# EAGLE board coil-driver (EAGLE 4.16)
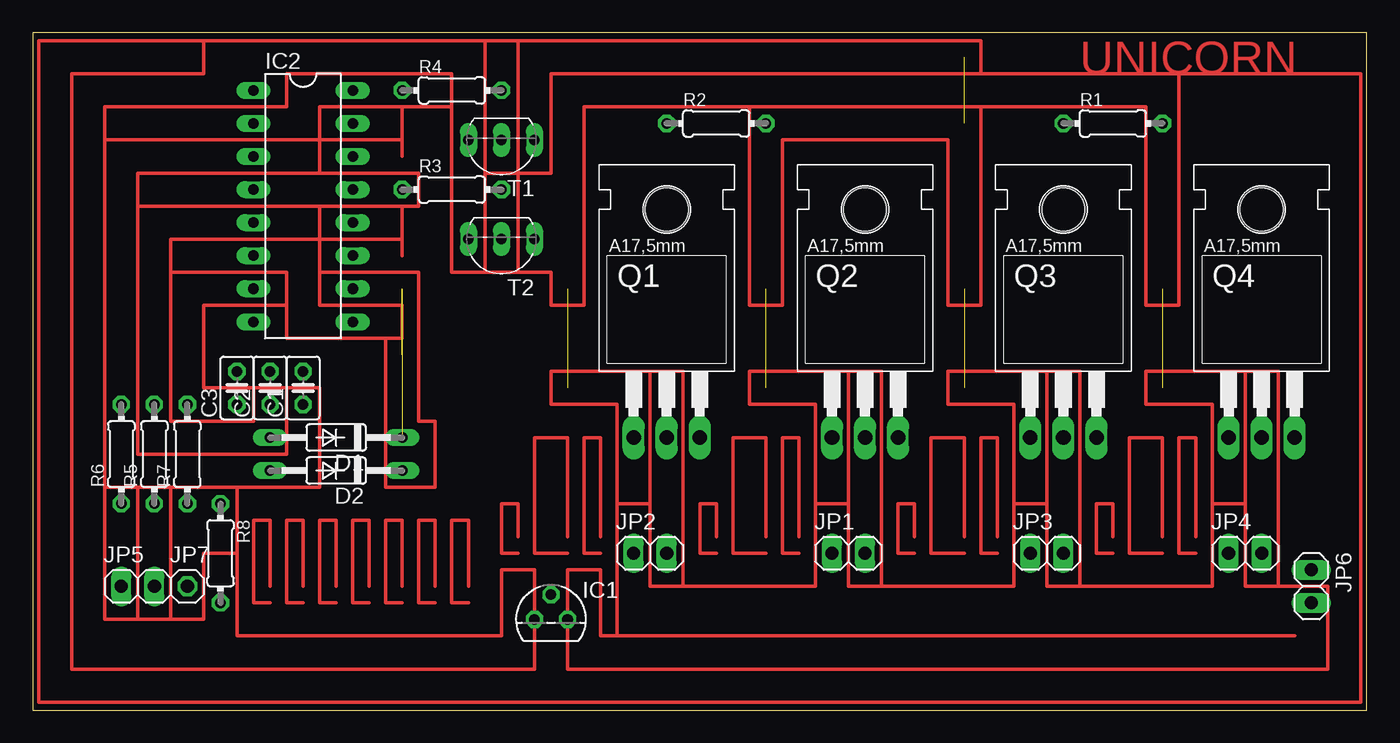
[diagram p0: board, top side]
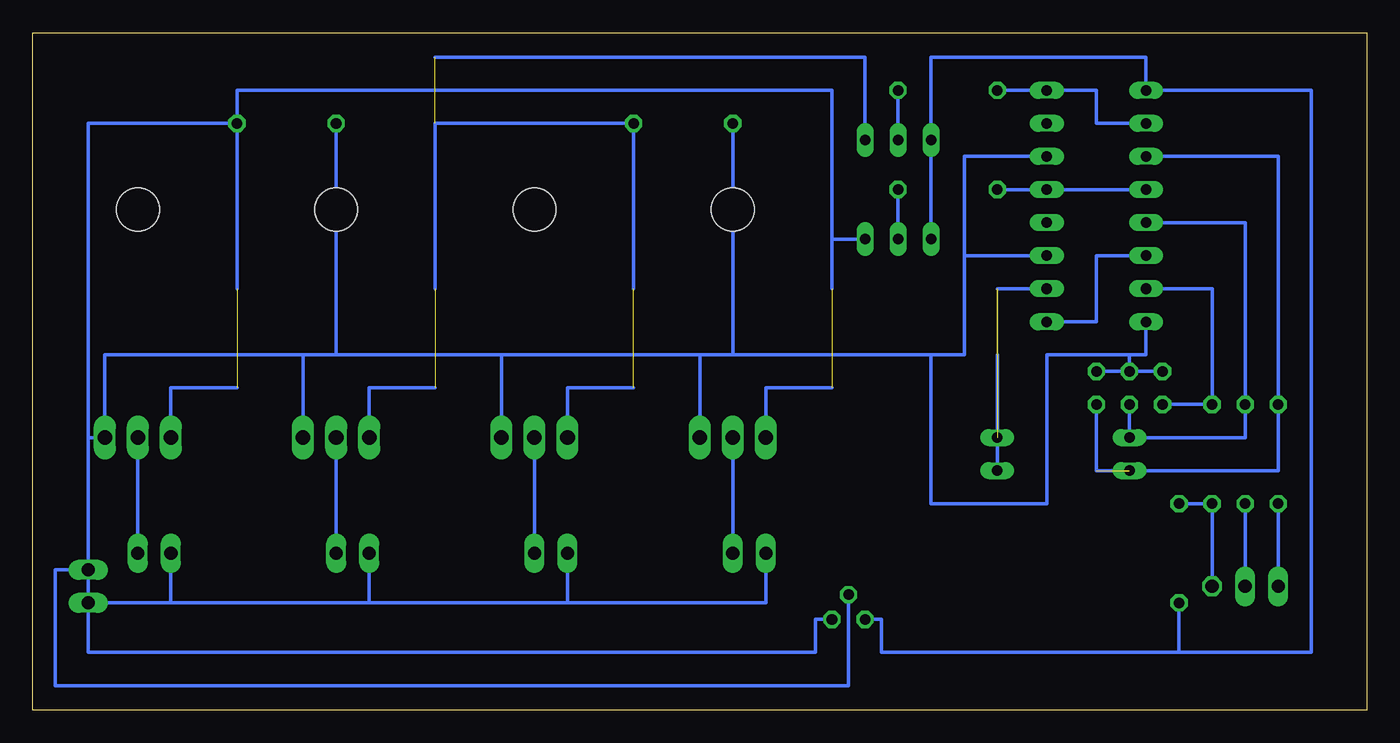
[diagram p1: board, bottom side, seen from below]

Size 102.54 x 52.06 mm. Coordinates in mm from the lower left corner, seen from the top.
Outline: 0,0 102.54,0 102.54,52.06 0,52.06 0,0
Copper layers (1*16): Top 0.035mm / dielectric 1.5mm / Bottom 0.035mm
Design rules "default": minimum track width 10mil, minimum drill 24mil, track to track 8mil, track to pad 8mil, pad to pad 8mil, via to via 8mil, smd to smd 8mil, copper to edge 40mil, drill to drill 8mil, minimum pad ring 10mil, minimum via ring 8mil, stop-mask expansion 4mil, vias tented up to drill 0mil, thermal gap 10mil

## Footprints (pad centres in the part's own frame; a part is rotated, then mirrored left to right if it is on the bottom)
C025-025X050 = drill 0.813 octagon: 1 -1.27,0; 2 1.27,0
DO35-10 = drill 0.813 long: A 5.08,0; C -5.08,0
TO92 = drill 0.813 octagon: 1 -1.27,0; 2 0,1.905; 3 1.27,0
DIL16 = drill 0.813 long: 1 -8.89,-3.81; 2 -6.35,-3.81; 3 -3.81,-3.81; 4 -1.27,-3.81; 5 1.27,-3.81; 6 3.81,-3.81; 7 6.35,-3.81; 8 8.89,-3.81; 9 8.89,3.81; 10 6.35,3.81; 11 3.81,3.81; 12 1.27,3.81; 13 -1.27,3.81; 14 -3.81,3.81; 15 -6.35,3.81; 16 -8.89,3.81
1X02 = drill 1.016 long: 1 -1.27,0; 2 1.27,0
1X01 = drill 1.016 octagon: 1 0,0
TO220 = drill 1.118 long: 1 -2.54,-6.35; 2 0,-6.35; 3 2.54,-6.35 | hole 3.302: 0,11.176
0204/7 = drill 0.813 octagon: 1 -3.81,0; 2 3.81,0
TO92-EBC = drill 0.813 long: B 0,-1.27; C -2.54,-1.27; E 2.54,-1.27

## Placement (x,y rotation side)
C1  [C025-025X050]  20.79,24.76 90 top
C2  [C025-025X050]  18.25,24.76 90 top
C3  [C025-025X050]  15.71,24.76 90 top
D1  [DO35-10]  23.33,20.95 180 top
D2  [DO35-10]  23.33,18.41 180 top
IC1  7805L  [TO92]  39.84,6.98 0 top
IC2  4049N  [DIL16]  20.79,38.73 270 top
JP1  [1X02]  62.7,12.06 0 top
JP2  [1X02]  47.46,12.06 0 top
JP3  [1X02]  77.94,12.06 0 top
JP4  [1X02]  93.18,12.06 0 top
JP5  [1X02]  8.09,9.52 0 top
JP6  [1X02]  98.26,9.52 270 top
JP7  [1X01]  11.9,9.52 0 top
Q1  BUZ10  [TO220]  48.73,27.3 0 top
Q2  BUZ10  [TO220]  63.97,27.3 0 top
Q3  BUZ10  [TO220]  79.21,27.3 0 top
Q4  BUZ10  [TO220]  94.45,27.3 0 top
R1  1k  [0204/7]  83.02,45.08 0 top
R2  1k  [0204/7]  52.54,45.08 0 top
R3  1k  [0204/7]  32.22,40 0 top
R4  1k  [0204/7]  32.22,47.62 0 top
R5  10k  [0204/7]  9.36,19.68 90 top
R6  10k  [0204/7]  6.82,19.68 90 top
R7  10k  [0204/7]  11.9,19.68 90 top
R8  10k  [0204/7]  14.44,12.06 270 top
T1  [TO92-EBC]  36.03,42.54 180 top
T2  [TO92-EBC]  36.03,34.92 180 top

## Library data of the parts
C1-C3 R1-R8 = rcl
D1 D2 = diode
IC1 = linear
IC2 = 40xx
JP1-JP7 = pinhead
Q1-Q4 = transistor-fet
T1 T2 = transistor

## Nets
0V: C1.2 C2.2 C3.2 IC1.2 IC2.8 IC2.11 IC2.14 JP6.1 Q1.3 Q2.3 Q3.3 Q4.3 R1.1 R2.1
+5V: IC1.1 IC2.1 R8.2 T1.E T2.E
+12V: IC1.3 JP1.1 JP2.1 JP3.1 JP4.1 JP6.2
N$1: IC2.2 R4.1
N$2: JP3.2 Q3.2
N$3: IC2.4 R3.1
N$4: JP2.2 Q1.2
N$5: JP1.2 Q2.2
N$6: R4.2 T1.B
N$7: JP4.2 Q4.2
N$8: R3.2 T2.B
N$9: Q2.1 Q3.1 R2.2 T1.C
N$10: C2.1 D1.A IC2.5 R5.2
N$11: Q1.1 Q4.1 R1.2 T2.C
N$12: C1.1 D2.A IC2.3 R6.2
N$13: D1.C D2.C IC2.10
N$14: JP5.2 R5.1
N$15: JP5.1 R6.1
N$16: IC2.6 IC2.9
N$17: C3.1 IC2.7 R7.2
N$44: JP7.1 R7.1 R8.1

## Tracks (layer width: path | path; a pad name or v marks a point on that pad's centre or on a via)
0V
  Bottom 0.254: 51.27,27.3 Q1.3 | 66.51,27.3 51.27,27.3 | 66.51,27.3 Q2.3 | 81.75,27.3 Q3.3 | 79.21,27.3 66.51,27.3 | 81.75,27.3 79.21,27.3 | 81.75,27.3 96.99,27.3 Q4.3 98.26,20.95 JP6.1 100.8,10.79 100.8,1.9 39.84,1.9 IC1.2 | IC2.8 16.98,27.3 18.25,27.3 | 18.25,27.3 24.6,27.3 24.6,15.87 33.49,15.87 33.49,27.3 | 48.73,27.3 33.49,27.3 | 51.27,27.3 48.73,27.3 | 48.73,27.3 R2.1 | 79.21,27.3 R1.1 | 30.95,34.92 IC2.11 | 30.95,34.92 30.95,27.3 33.49,27.3 | IC2.14 30.95,42.54 30.95,34.92 | C2.2 C3.2 | C2.2 C1.2 | 18.25,27.3 C2.2
+5V
  Bottom 0.254: T2.E T1.E 33.49,50.16 16.98,50.16 IC2.1 4.28,47.62 4.28,4.44 37.3,4.44 | R8.2 14.44,4.44 37.3,4.44 | IC1.1 37.3,6.98 37.3,4.44
+12V
  Bottom 0.254: JP2.1 46.19,8.25 61.43,8.25 | 61.43,8.25 JP1.1 | 76.67,8.25 JP3.1 | 76.67,8.25 61.43,8.25 | 91.91,8.25 JP4.1 | 91.91,8.25 76.67,8.25 | 91.91,8.25 JP6.2 98.26,4.44 42.38,4.44 42.38,6.98 IC1.3
N$1
  Bottom 0.254: IC2.2 20.79,45.08 20.79,47.62 R4.1
N$2
  Bottom 0.254: JP3.2 Q3.2
N$3
  Bottom 0.254: IC2.4 R3.1
N$4
  Bottom 0.254: JP2.2 Q1.2
N$5
  Bottom 0.254: JP1.2 Q2.2
N$6
  Bottom 0.254: T1.B R4.2
N$7
  Bottom 0.254: JP4.2 Q4.2
N$8
  Bottom 0.254: T2.B R3.2
N$9  (3 unrouted)
  Bottom 0.254: Q2.1 61.43,24.76 56.35,24.76 | 56.35,32.38 R2.2 71.59,45.08 71.59,32.38 | 71.59,24.76 76.67,24.76 Q3.1 | T1.C 38.57,50.16 71.59,50.16
N$10
  Bottom 0.254: IC2.5 9.36,37.46 R5.2 9.36,20.95 D1.A C2.1
N$11  (2 unrouted)
  Bottom 0.254: Q4.1 91.91,24.76 86.83,24.76 | R1.2 86.83,47.62 41.11,47.62 41.11,36.19 | R1.2 86.83,32.38 | 41.11,36.19 41.11,32.38 | 41.11,24.76 46.19,24.76 Q1.1 | 41.11,36.19 T2.C | R1.2 98.26,45.08 98.26,4.44 42.38,4.44 42.38,6.98
N$12  (1 unrouted)
  Bottom 0.254: IC2.3 6.82,42.54 R6.2 6.82,18.41 20.79,18.41 C1.1
N$13  (2 unrouted)
  Bottom 0.254: IC2.10 28.41,32.38 | D2.C 28.41,27.3
N$14
  Bottom 0.254: JP5.2 R5.1
N$15
  Bottom 0.254: JP5.1 R6.1
N$16
  Bottom 0.254: IC2.6 20.79,34.92 20.79,29.84 IC2.9
N$17
  Bottom 0.254: IC2.7 11.9,32.38 R7.2 C3.1
N$18  (via drill 0.6 pad 2.54)
  other vias: 48.73,38.73
N$19  (via drill 0.6 pad 2.54)
  other vias: 63.97,38.73
N$20  (via drill 0.6 pad 2.54)
  other vias: 79.21,38.73
N$21  (via drill 0.6 pad 2.54)
  other vias: 94.45,38.73
N$23
  Top 0.254: 65.24,9.52 65.24,26.03 62.7,26.03 | 65.24,9.52 75.4,9.52 75.4,15.87 | 75.4,15.87 75.4,23.49 70.32,23.49 70.32,26.03 77.94,26.03 | 77.94,15.87 75.4,15.87 | 77.94,26.03 77.94,15.87 | 65.24,9.52 62.7,9.52 62.7,15.87 | 62.7,26.03 55.08,26.03 55.08,23.49 60.16,23.49 60.16,15.87 | 62.7,15.87 62.7,26.03 | 77.94,26.03 80.48,26.03 80.48,9.52 | 77.94,15.87 77.94,9.52 80.48,9.52 | 60.16,15.87 62.7,15.87 | 60.16,15.87 60.16,9.52 50,9.52 | 80.48,9.52 90.64,9.52 90.64,15.87 | 90.64,15.87 90.64,23.49 85.56,23.49 85.56,26.03 93.18,26.03 | 50,9.52 50,26.03 47.46,26.03 | 50,9.52 47.46,9.52 47.46,15.87 | 47.46,26.03 39.84,26.03 39.84,23.49 44.92,23.49 44.92,15.87 | 93.18,15.87 90.64,15.87 | 93.18,26.03 93.18,15.87 | 93.18,26.03 95.72,26.03 95.72,9.52 | 93.18,15.87 93.18,9.52 95.72,9.52 | 47.46,15.87 47.46,26.03 | 44.92,15.87 47.46,15.87 | 44.92,5.71 96.99,5.71 | 95.72,9.52 99.53,9.52 99.53,3.17 41.11,3.17 41.11,10.79 43.65,10.79 43.65,5.71 44.92,5.71 | 44.92,5.71 44.92,15.87
N$24
  Top 0.254: 18.25,8.25 16.98,8.25 16.98,14.6 18.25,14.6 18.25,9.52
N$25
  Top 0.254: 20.79,8.25 19.52,8.25 19.52,14.6 20.79,14.6 20.79,9.52
N$26
  Top 0.254: 23.33,8.25 22.06,8.25 22.06,14.6 23.33,14.6 23.33,9.52
N$27
  Top 0.254: 22.06,33.65 29.68,33.65 29.68,22.22 30.95,22.22 30.95,17.14 27.14,17.14 27.14,28.57 | 27.14,28.57 22.06,28.57 | 27.14,28.57 19.52,28.57 19.52,31.11 | 19.52,31.11 13.17,31.11 13.17,24.76 16.98,24.76 | 27.14,28.57 28.41,28.57 28.41,31.11 22.06,31.11 22.06,36.19 | 19.52,31.11 19.52,33.65 10.63,33.65 | 10.63,33.65 10.63,22.22 16.98,22.22 16.98,24.76 | 10.63,33.65 10.63,36.19 22.06,36.19 | 19.52,24.76 22.06,24.76 22.06,17.14 15.71,17.14 | 19.52,24.76 16.98,24.76 | 19.52,24.76 19.52,19.68 8.09,19.68 8.09,38.73 | 10.63,6.98 13.17,6.98 13.17,12.06 15.71,12.06 | 28.41,38.73 28.41,34.92 | 28.41,38.73 28.41,36.19 22.06,36.19 | 22.06,38.73 28.41,38.73 | 22.06,38.73 22.06,36.19 | 8.09,38.73 22.06,38.73 | 28.41,38.73 29.68,38.73 29.68,41.27 22.06,41.27 | 15.71,17.14 10.63,17.14 | 10.63,17.14 10.63,6.98 | 10.63,6.98 8.09,6.98 | 55.08,46.35 55.08,31.11 57.62,31.11 57.62,43.81 70.32,43.81 70.32,31.11 72.86,31.11 72.86,46.35 | 8.09,6.98 5.55,6.98 5.55,17.14 | 10.63,17.14 8.09,17.14 | 8.09,17.14 8.09,6.98 | 8.09,38.73 8.09,41.27 22.06,41.27 | 55.08,46.35 42.38,46.35 42.38,31.11 39.84,31.11 39.84,33.65 37.3,33.65 | 28.41,46.35 22.06,46.35 22.06,43.81 | 32.22,46.35 28.41,46.35 | 28.41,46.35 28.41,43.81 | 28.41,43.81 28.41,42.54 | 5.55,17.14 8.09,17.14 | 32.22,46.35 32.22,48.89 19.52,48.89 19.52,46.35 5.55,46.35 5.55,43.81 | 72.86,46.35 55.08,46.35 | 72.86,46.35 85.56,46.35 85.56,31.11 88.1,31.11 88.1,48.89 | 5.55,43.81 5.55,17.14 | 28.41,43.81 22.06,43.81 | 22.06,43.81 22.06,41.27 | 32.22,46.35 32.22,33.65 34.76,33.65 | 34.76,33.65 37.3,33.65 | 37.3,41.27 37.3,33.65 | 37.3,41.27 39.84,41.27 39.84,48.89 72.86,48.89 | 22.06,43.81 5.55,43.81
  Top 0.254: 72.86,48.89 72.86,51.43 37.3,51.43 | 37.3,51.43 37.3,41.27 | 34.76,41.27 34.76,33.65 | 34.76,41.27 37.3,41.27 | 34.76,51.43 34.76,41.27 | 34.76,51.43 37.3,51.43 | 88.1,48.89 72.86,48.89 | 88.1,48.89 102.07,48.89 102.07,0.63 0.47,0.63 0.47,51.43 13.17,51.43 | 13.17,51.43 13.17,48.89 3.01,48.89 3.01,3.17 38.57,3.17 38.57,10.79 36.03,10.79 36.03,5.71 15.71,5.71 15.71,12.06 | 13.17,51.43 34.76,51.43 | 15.71,12.06 15.71,17.14
N$28
  Top 0.254: 25.87,8.25 24.6,8.25 24.6,14.6 25.87,14.6 25.87,9.52
N$29
  Top 0.254: 52.54,12.06 51.27,12.06 51.27,15.87 52.54,15.87 52.54,13.33
N$30
  Top 0.254: 56.35,12.06 53.81,12.06 53.81,20.95 56.35,20.95 56.35,13.33
N$31
  Top 0.254: 58.89,12.06 57.62,12.06 57.62,20.95 58.89,20.95 58.89,13.33
N$32
  Top 0.254: 67.78,12.06 66.51,12.06 66.51,15.87 67.78,15.87 67.78,13.33
N$33
  Top 0.254: 71.59,12.06 69.05,12.06 69.05,20.95 71.59,20.95 71.59,13.33
N$34
  Top 0.254: 74.13,12.06 72.86,12.06 72.86,20.95 74.13,20.95 74.13,13.33
N$35
  Top 0.254: 83.02,12.06 81.75,12.06 81.75,15.87 83.02,15.87 83.02,13.33
N$36
  Top 0.254: 86.83,12.06 84.29,12.06 84.29,20.95 86.83,20.95 86.83,13.33
N$37
  Top 0.254: 89.37,12.06 88.1,12.06 88.1,20.95 89.37,20.95 89.37,13.33
N$38
  Top 0.254: 43.65,12.06 42.38,12.06 42.38,20.95 43.65,20.95 43.65,13.33
N$39
  Top 0.254: 41.11,12.06 38.57,12.06 38.57,20.95 41.11,20.95 41.11,13.33
N$40
  Top 0.254: 37.3,12.06 36.03,12.06 36.03,15.87 37.3,15.87 37.3,13.33
N$41
  Top 0.254: 28.41,8.25 27.14,8.25 27.14,14.6 28.41,14.6 28.41,9.52
N$42
  Top 0.254: 30.95,8.25 29.68,8.25 29.68,14.6 30.95,14.6 30.95,9.52
N$43
  Top 0.254: 33.49,8.25 32.22,8.25 32.22,14.6 33.49,14.6 33.49,9.52
N$44
  Bottom 0.254: JP7.1 R7.1 R8.1

## Text on the board
Top: UNICORN